# Altium PCB ESP Board.PcbDoc
Units mm, origin at the board's own origin, x right, y up, seen from the top; angles counter-clockwise.
Board outline 65 x 65 mm, 2 copper layers (Top Layer, Bottom Layer); 39 components, 26 nets, 140 pads, 0 vias.
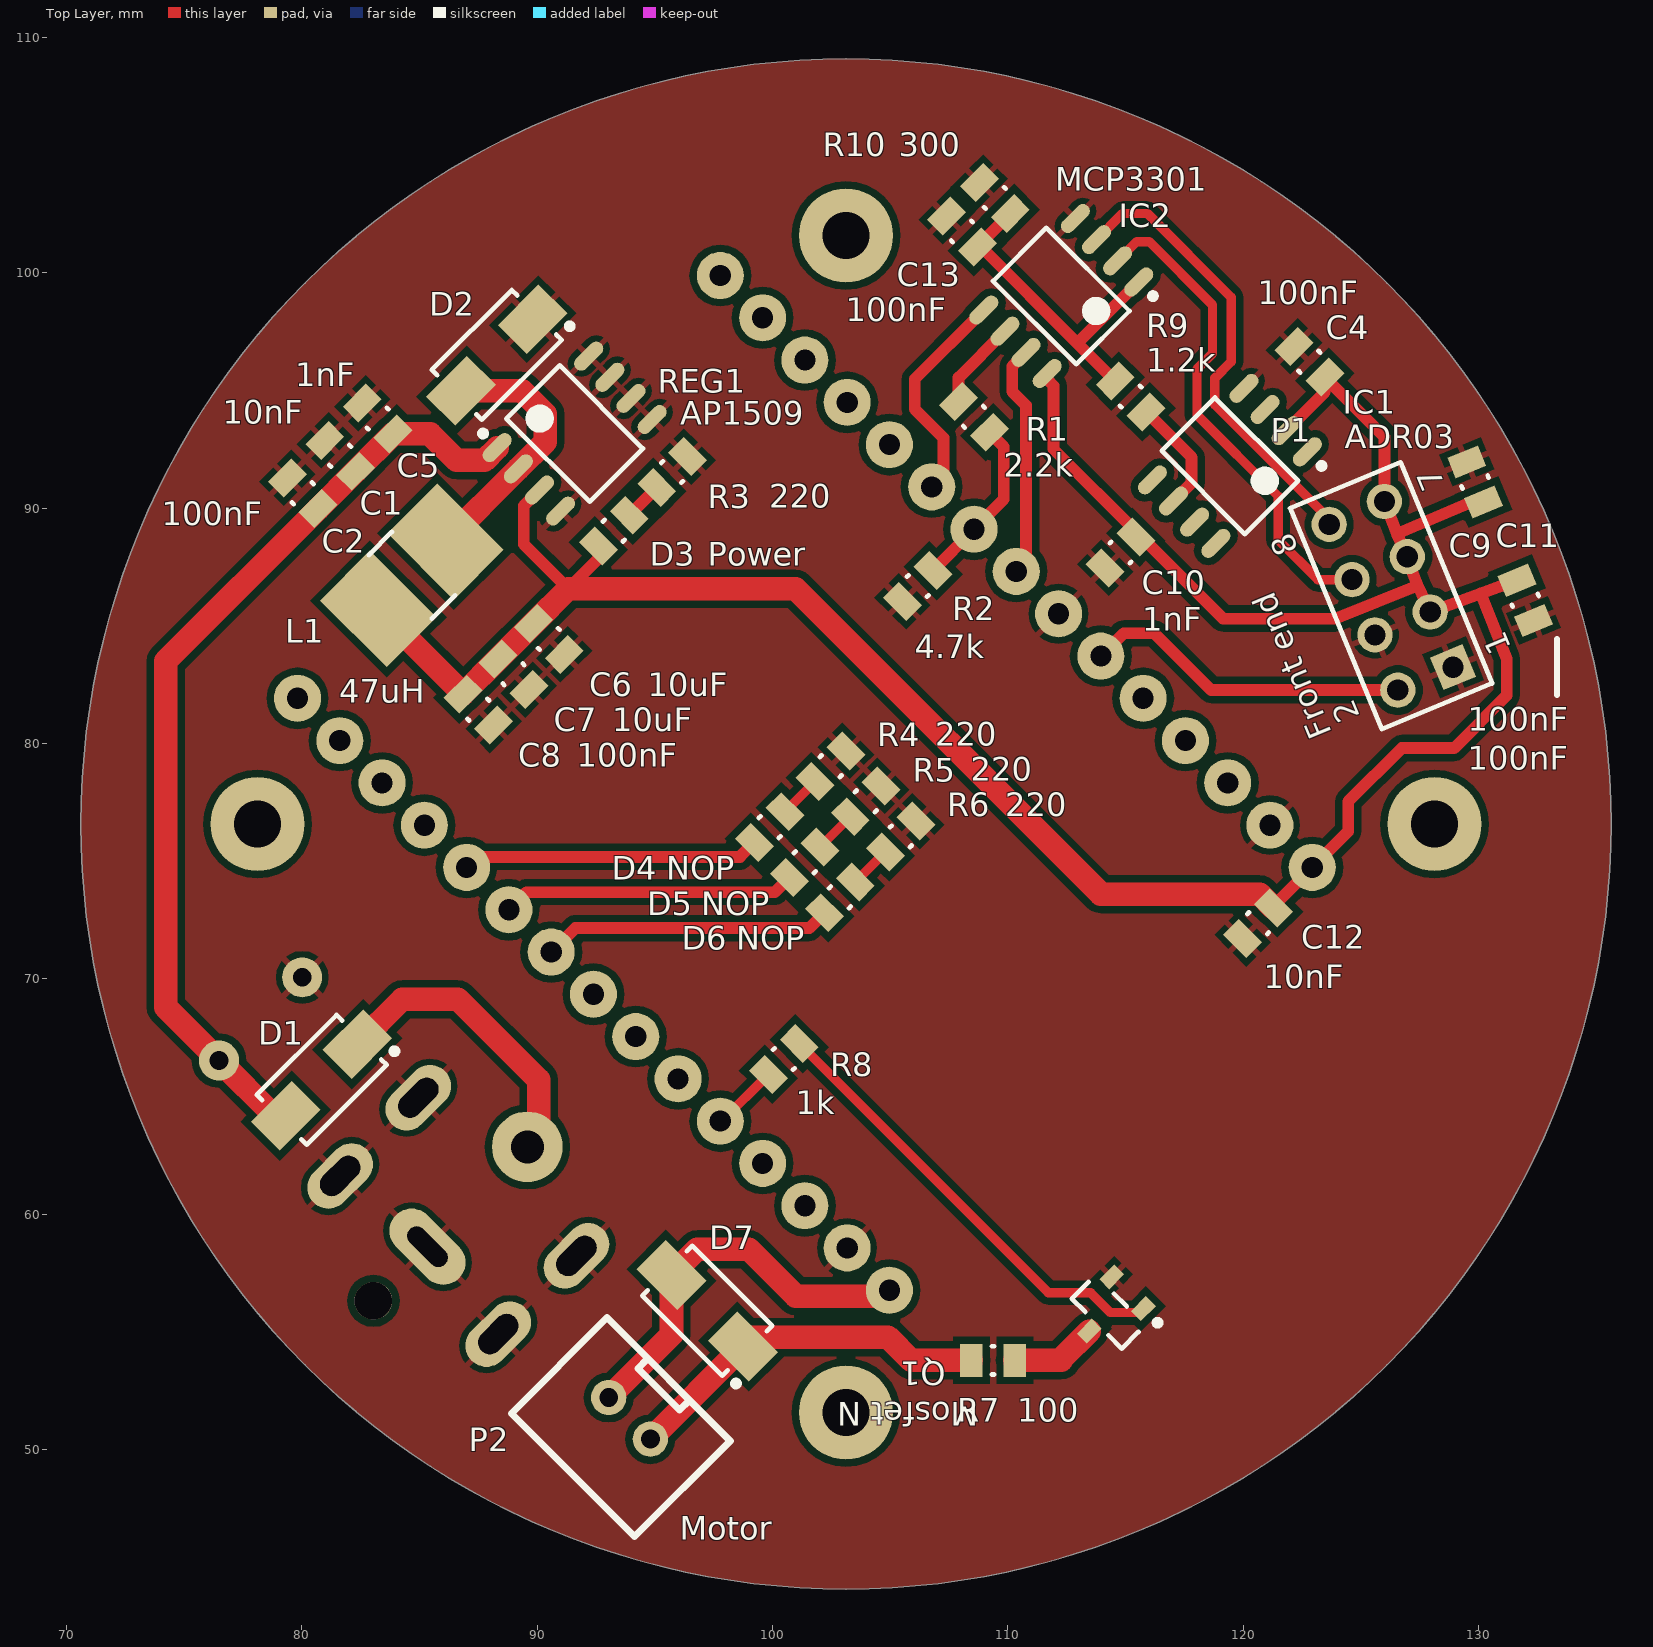
[diagram p0: Top Layer view]
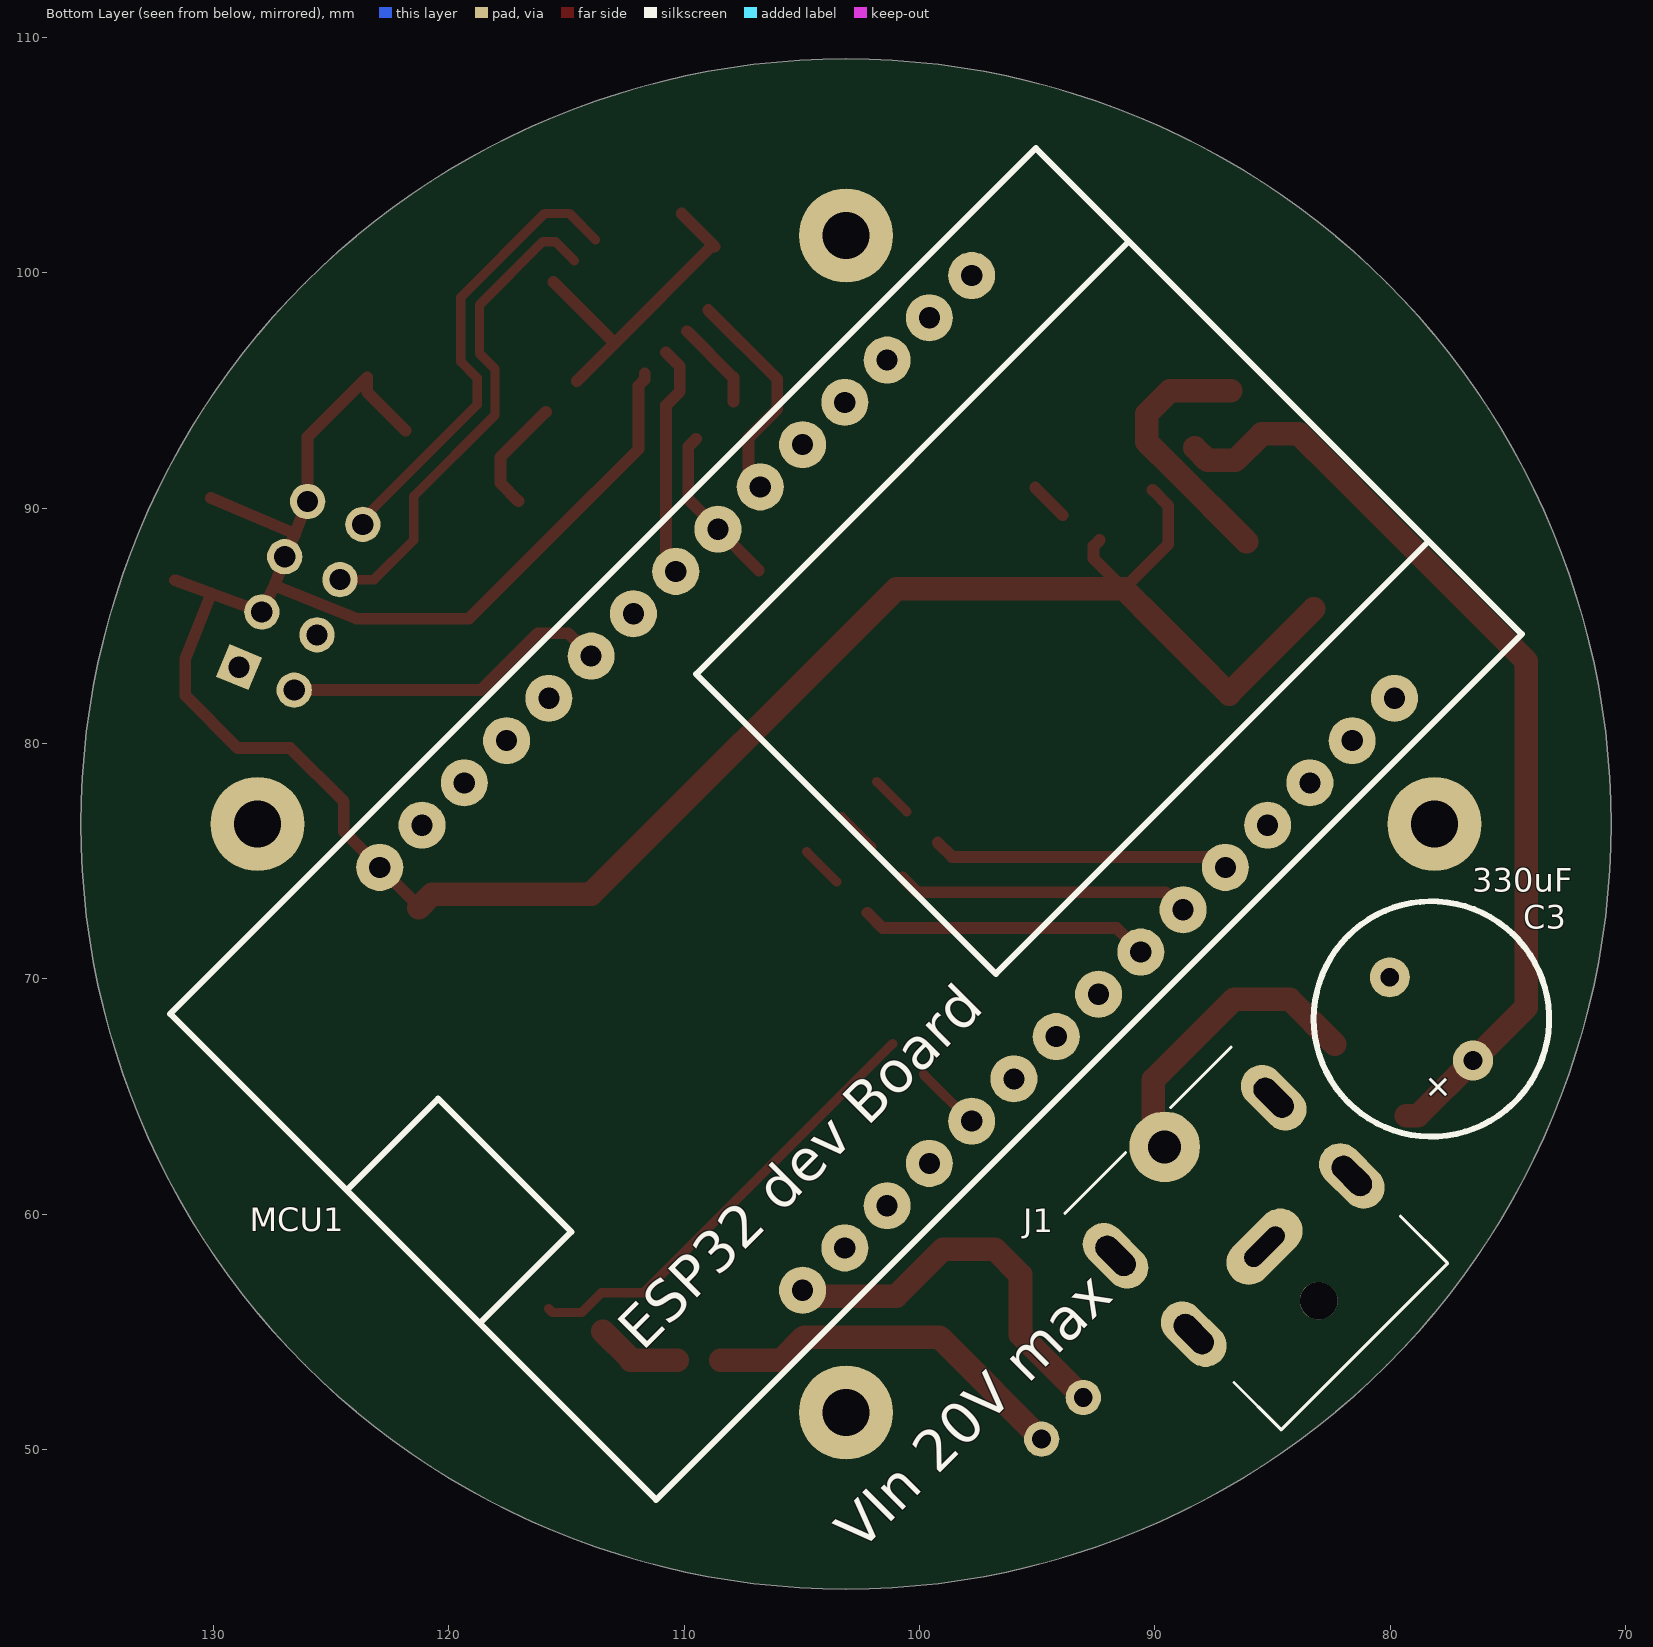
[diagram p1: Bottom Layer view, seen from below]

## Layer stack, top to bottom
Top Solder: solder mask 0.0102, Solder Resist, Dk 3.5
Top Layer: signal copper 0.0356
Dielectric 1: dielectric 0.32, FR-4, Dk 4.8
Bottom Layer: signal copper 0.0356
Bottom Solder: solder mask 0.0102, Solder Resist, Dk 3.5

## Board outline
70.624,76.581 ccw(c103.124,76.581) 103.124,44.081 ccw(c103.124,76.581) 135.624,76.581 ccw(c103.124,76.581) 103.124,109.081 ccw(c103.124,76.581)

## Design rules (kind name [scope] priority, off if disabled: settings)
Clearance [All] p1: gap=0.3 ignorepadtopadclearanceinfootprint=FALSE except(0: Arc-Text Arc-Hole Track-Text Track-Hole SMDPad-Text SMDPad-Hole THPad-Text THPad-Hole Via-Text Via-Hole Fill-Text Fill-Hole Poly-Text Poly-Hole Region-Text Region-Hole Text-Text Text-Hole; 0.2: Arc-Arc Arc-Track Arc-SMDPad Arc-THPad Arc-Via Track-Track Track-SMDPad Track-THPad Track-Via SMDPad-SMDPad SMDPad-THPad SMDPad-Via THPad-THPad THPad-Via Via-Via)
PolygonConnect [All] p1: connectstyle=Relief reliefconductorwidth=0.254 reliefentries=4 polygonreliefangle="90 Angle" airgapwidth=0.254
RoutingVias [All] p1: holewidth=0.711 width=1.27 viastyle="Through Hole" minholewidth=0.711 minwidth=1.27 maxholewidth=0.711 maxwidth=1.27
SolderMaskExpansion [All] p1: expansion=0.102
Width [All] p1: maxlimit=10 minlimit=0.15 preferedwidth=0.254 minimp=50.000000 maximp=50.000000 favimp=50.000000
30 further rules are at their usual default settings.

## Components (designator, comment, footprint, x,y, rotation, side; value= is the part's Value field where it differs from the comment)
C1 "10nF" 0805 81.638,92.218 r315 top
C2 "100nF" 0805 80.048,90.629 r315 top
C3 "330uF" ESL476M100AH9AA 78.257,68.301 r45 bottom
C4 "100nF" 0805 122.809,96.215 r315 top
C5 "1nF" 0805 83.227,93.808 r315 top
C6 "10uF" 0805 90.501,84.44 r315 top
C7 "10uF" 0805 89.002,82.94 r315 top
C8 "100nF" 0805 87.502,81.44 r315 top
C9 "100nF" 0805 129.845,91.11 r112.5 top
C10 "1nF" 0805 114.783,88.113 r45 top
C11 "100nF" 0805 131.978,86.081 r112.5 top
C12 "10nF" 0805 120.628,72.365 r45 top
C13 "100nF" 0805 108.052,101.752 r315 top
D1 "Diode" DO-214 80.848,65.71 r225 top
D2 "Diode" DO-214 88.294,96.505 r225 top
D3 "Power" 0805 93.261,89.043 r45 top
D4 "NOP" 0805 99.883,76.448 r45 top
D5 "NOP" 0805 101.374,74.957 r45 top
D6 "NOP" 0805 102.864,73.467 r45 top
D7 "Diode" DO-214 97.231,55.905 r135 top
IC1 "ADR03" SOIC8 119.431,91.796 r225 top
IC2 "MCP3301" SOIC8 112.268,99.009 r225 top
J1 "VIn 20V max" PJ-082BH 85.7,58.979 r45 bottom
L1 "47uH" "1812 Low density" 84.684,87.147 r45 top
MCU1 "ESP32 dev Board" "ESP32 dev board" 101.377,78.328 r225 bottom locked
P1 "Front end" HDR2X4 128.911,83.241 r112.5 top
P2 "Motor" XH2 93.929,51.333 r135 top
Q1 "Mosfet N" "sot 23" 114.275,55.855 r225 top
R1 "2.2k" 0805 108.56,93.876 r315 top
R2 "4.7k" 0805 106.172,86.69 r45 top
R3 "220" 0805 95.739,91.531 r225 top
R4 "220" 0805 102.469,79.035 r225 top
R5 "220" 0805 103.96,77.544 r45 top
R6 "220" 0805 105.451,76.053 r45 top
R7 "100" 0805 109.372,53.797 r0 top
R8 "1k" 0805 100.482,66.599 r225 top
R9 "1.2k" 0805 115.214,94.742 r315 top
R10 "300" 0805 109.449,103.175 r315 top
REG1 "AP1509" SOIC8 91.598,93.164 r45 top

## Footprints (in the part's own frame and the unit in brackets; to place one, negate y for a bottom-side part, rotate by r counter-clockwise, add the part's x,y. Pads: shape width x height; smd on the part's side, far side on the other; paste and mask are expansions set on the pad)
0805 [mm] "Chip Resistor, 2-Leads, Body 2.00x1.25mm, IPC Medium Density"
  rect 0.95x1.4 smd: 1(-0.925,0) 2(0.925,0)
  silkscreen extent -0.05,-0.6 0.05,0.6, body extent -1.05,-0.7 1.05,0.7, height 0.55
"1812 Low density" [mm] "Chip Inductor, 2-Leads, Body 4,50x3,20mm, IPC Low Density"
  rect 3x4 smd: 1(-2.02,0) 2(2.02,0)
  silkscreen extent -0.7,-1.9 0.7,1.9, body extent -2.4,-1.7 2.4,1.7, height 2.8
DO-214 [mm] "Molded Diode, 2-Leads, Body 4.38x2.73mm, IPC Medium Density"
  rect 2.45x1.75 smd: 1(-2.15,0) 2(2.15,0)
  silkscreen extent -3.17,-1.5 2.4,1.5, body extent -2.6,-1.48 2.6,1.48, height 2.2
ESL476M100AH9AA [mm]
  round 1.7 hole 0.8: 1(-2.5,0) 2(2.5,0)
  silkscreen extent -5,-5 5,5, body extent -5.25,-5.25 5.25,5.25, height 14.11
"ESP32 dev board" [mm]
  round 2 hole 0.9: 1(-12.7,17.78) 2(-12.7,15.24) 3(-12.7,12.7) 4(-12.7,10.16) 5(-12.7,7.62) 6(-12.7,5.08) 7(-12.7,2.54) 8(-12.7,0) 9(-12.7,-2.54) 10(-12.7,-5.08) 11(-12.7,-7.62) 12(-12.7,-10.16) 13(-12.7,-12.7) 14(-12.7,-15.24) 15(-12.7,-17.78) 16(12.7,-17.78) 17(12.7,-15.24) 18(12.7,-12.7) 19(12.7,-10.16) 20(12.7,-7.62) 21(12.7,-5.08) 22(12.7,-2.54) 23(12.7,0) 24(12.7,2.54) 25(12.7,5.08) 26(12.7,7.62) 27(12.7,10.16) 28(12.7,12.7) 29(12.7,15.24) 30(12.7,17.78)
  silkscreen extent -14.6,-28.47 14.6,23.53
HDR2X4 [mm] "Connector; Header; 4x2 Position"
  rect 1.5x1.5 hole 0.9: 1(0,0)
  round 1.5 hole 0.9: 2(0,2.54) 3(2.54,0) 4(2.54,2.54) 5(5.08,0) 6(5.08,2.54) 7(7.62,0) 8(7.62,2.54)
  silkscreen extent -1.27,-1.27 8.89,3.81
PJ-082BH [mm] "Barrel Power Jack"
  round 3 hole 1.4: 1(5.5,0)
  oval 1.9x3.8 hole 0.8 slot 2.1 at 90 deg: 2(-0.5,0)
  oval 3.2x1.8 hole 1 slot 2 at 0 deg: 3(-1,-4.75) 3(-1,4.75) 3(3.7,-4.75) 3(3.7,4.75)
  round 1.6 hole 1.6 unplated: ""(-3.75,0)
  silkscreen extent -6.5,-5 6.5,5, body extent -6.59,-5.09 6.54,5.11, height 10
SOIC8 [mm] "SOIC, 8-Leads, Body 4.90x3.90mm, Pitch 1.27mm, IPC Medium Density"
  oval 1.5x0.6 smd: 1(-2.75,1.905) 2(-2.75,0.635) 3(-2.75,-0.635) 4(-2.75,-1.905) 5(2.75,-1.905) 6(2.75,-0.635) 7(2.75,0.635) 8(2.75,1.905)
  silkscreen extent -2.87,-2.5 1.6,2.88, body extent -3,-2.5 3,2.5, height 1.75
"sot 23" [mm] "SOT23, 3-Leads, Body 2.90x2.30mm, Pitch 0.95mm, IPC Medium Density"
  rect 0.9x0.6 smd: 1(-1.15,0.95) 2(-1.15,-0.95) 3(1.15,0)
  silkscreen extent -1.27,-1.5 0.7,1.92, body extent -1.3,-1.5 1.3,1.5, height 1.1
XH2 [mm]
  round 1.5 hole 0.8: 1(-1.25,0) 2(1.25,0)
  silkscreen extent -3.7,-2.35 3.7,3.4, body extent -3.7,-2.35 3.7,3.4, height 7

## Part data
C1 C2 C4 C5 C6 C7 C8 C9 C10 C11 C12 C13: library part Cap, Supplier Part Number 1=1276-2044-1-ND, Supplier Part Number 10=1276-CL10B104KB8NNNLCT-ND, Supplier Part Number 11=399-1085-1-ND, Supplier Part Number 12=1276-1021-1-ND, Supplier Part Number 13=587-2985-1-ND, Supplier Part Number 14=490-14603-1-ND, Supplier Part Number 15=311-3700-1-ND, Supplier Part Number 16=311-1042-1-ND, Supplier Part Number 17=311-1415-1-ND, Supplier Part Number 18=1276-1907-1-ND, Supplier Part Number 19=587-4321-1-ND, Supplier 1=Digi-Key, Supplier 2=Digi-Key, Supplier 3=Digi-Key, Supplier 4=Digi-Key, Supplier 5=Digi-Key, Supplier 6=Digi-Key, Supplier 7=Digi-Key, Supplier 8=Digi-Key, Supplier 9=Digi-Key, Supplier 10=Digi-Key, Supplier 11=Digi-Key, Supplier 12=Digi-Key, Supplier 13=Digi-Key, Supplier 14=Digi-Key, Supplier 15=Digi-Key, Supplier 16=Digi-Key, Supplier 17=Digi-Key, Supplier 18=Digi-Key, Supplier 19=Digi-Key, Supplier 20=Digi-Key, Supplier 21=Digi-Key, Supplier 22=Digi-Key, Supplier Part Number 2=1276-1018-1-ND, Supplier Part Number 3=1276-1182-1-ND, Supplier Part Number 4=1276-1009-1-ND, Supplier Part Number 5=1276-1098-1-ND, Supplier Part Number 6=1276-1119-1-ND, Supplier Part Number 7=490-12737-1-ND, Supplier Part Number 8=1276-1183-1-ND, Supplier Part Number 9=587-1249-1-ND, Supplier Part Number 20=1276-6767-1-ND, Supplier Part Number 21=1276-7060-1-ND, Supplier Part Number 22=311-1084-1-ND
C3: library part "Cap Polar", Supplier Part Number 1=478-9181-1-ND, Supplier 1=Digi-Key, Supplier 2=Digi-Key, Supplier 3=Digi-Key, Supplier 4=Digi-Key, Supplier 5=Digi-Key, Supplier 6=Digi-Key, Supplier 7=Digi-Key, Supplier 8=Digi-Key, Supplier Part Number 2=478-9173-1-ND, Supplier Part Number 3=493-11037-ND, Supplier Part Number 4=PCE3462CT-ND, Supplier Part Number 5=399-18864-1-ND, Supplier Part Number 6=399-10512-1-ND, Supplier Part Number 7=399-15746-ND, Supplier Part Number 8=1189-3752-1-ND
D1 D2 D7: "Cmon its a diode what more do I need to say?", Supplier Part Number 1=MBR10100GOS-ND, Supplier 1=Digi-Key, Supplier 2=Digi-Key, Supplier Part Number 2=1655-1504-1-ND
D3 D4 D5 D6: library part LED, Supplier Part Number 1=732-4979-1-ND, Supplier 1=Digi-Key, Supplier 2=Digi-Key, Supplier 3=Digi-Key, Supplier 4=Digi-Key, Supplier Part Number 2=732-4971-1-ND, Supplier Part Number 3=732-4966-1-ND, Supplier Part Number 4=732-4981-1-ND
IC1: library part ADR0X, "Precision voltage reference 0.1%", Supplier Part Number 1=ADR02ARZ-ND, Supplier 1=Digi-Key
IC2: "13 bit differential ADC", Supplier Part Number 1=MCP3301-BI/SN-ND, Supplier 1=Digi-Key
J1: library part "Barrel Power Plug", Supplier Part Number 1=CP-082BHTR-ND, Supplier 1=Digi-Key
L1: library part Inductor, Supplier Part Number 1=541-1250-1-ND, Supplier Part Number 10=SRP1770TA-5R6MCT-ND, Supplier Part Number 11=SRN6028-100MCT-ND, Supplier Part Number 12=SRN2510F-2R2MCT-ND, Supplier Part Number 13=490-3992-1-ND, Supplier 1=Digi-Key, Supplier 2=Digi-Key, Supplier 3=Digi-Key, Supplier 4=Digi-Key, Supplier 5=Digi-Key, Supplier 6=Digi-Key, Supplier 7=Digi-Key, Supplier 8=Digi-Key, Supplier 9=Digi-Key, Supplier 10=Digi-Key, Supplier 11=Digi-Key, Supplier 12=Digi-Key, Supplier 13=Digi-Key, Supplier Part Number 2=541-1253-1-ND, Supplier Part Number 3=SRN6028-3R9MCT-ND, Supplier Part Number 4=SRN6028-4R7MCT-ND, Supplier Part Number 5=490-10563-1-ND, Supplier Part Number 6=1276-6932-1-ND, Supplier Part Number 7=587-2042-1-ND, Supplier Part Number 8=535-12790-1-ND, Supplier Part Number 9=SRP1265A-1R0MCT-ND
MCU1: "Dev board of the esp32"
P1: library part "Header 4X2", "Header, 4-Pin, Dual row", LatestRevisionDate=17-Jul-2002, LatestRevisionNote="Re-released for DXP Platform.", Publisher="Altium Limited"
P2: library part "Header 2", "Header, 2-Pin", LatestRevisionDate=17-Jul-2002, LatestRevisionNote="Re-released for DXP Platform.", Publisher="Altium Limited"
Q1: Supplier Part Number 1=1727-5305-1-ND, Supplier 1=Digi-Key, Supplier 2=Digi-Key, Supplier 3=Digi-Key, Supplier 4=Digi-Key, Supplier 5=Digi-Key, Supplier 6=Digi-Key, Supplier 7=Digi-Key, Supplier Part Number 2=1727-1123-1-ND, Supplier Part Number 3=BSC0906NSATMA1CT-ND, Supplier Part Number 4=T2N7002AKLMCT-ND, Supplier Part Number 5=1727-4714-1-ND, Supplier Part Number 6=497-14572-5-ND, Supplier Part Number 7=IPP180N10N3GXKSA1-ND
R1 R2 R3 R4 R5 R6 R7 R8 R9 R10: library part Resistor, Supplier Part Number 1=RHM10DCT-ND, Supplier Part Number 10=311-200JRCT-ND, Supplier Part Number 11=311-300JRCT-ND, Supplier Part Number 12=YAG3356CT-ND, Supplier Part Number 13=311-220GRCT-ND, Supplier Part Number 14=311-220KGRCT-ND, Supplier Part Number 15=311-1.0KGRCT-ND, Supplier Part Number 16=311-200KHRCT-ND, Supplier Part Number 17=A102451-ND, Supplier Part Number 18=311-2.00KHRCT-ND, Supplier Part Number 19=311-10KGRCT-ND, Supplier 1=Digi-Key, Supplier 2=Digi-Key, Supplier 3=Digi-Key, Supplier 4=Digi-Key, Supplier 5=Digi-Key, Supplier 6=Digi-Key, Supplier 7=Digi-Key, Supplier 8=Digi-Key, Supplier 9=Digi-Key, Supplier 10=Digi-Key, Supplier 11=Digi-Key, Supplier 12=Digi-Key, Supplier 13=Digi-Key, Supplier 14=Digi-Key, Supplier 15=Digi-Key, Supplier 16=Digi-Key, Supplier 17=Digi-Key, Supplier 18=Digi-Key, Supplier 19=Digi-Key, Supplier 20=Digi-Key, Supplier 21=Digi-Key, Supplier 22=Digi-Key, Supplier 23=Digi-Key, Supplier 24=Digi-Key, Supplier 25=Digi-Key, Supplier 26=Digi-Key, Supplier 27=Digi-Key, Supplier 28=Digi-Key, Supplier 29=Digi-Key, Supplier 30=Digi-Key, Supplier 31=Digi-Key, Supplier 32=Digi-Key, Supplier 33=Digi-Key, Supplier 34=Digi-Key, Supplier 35=Digi-Key, Supplier 36=Digi-Key, Supplier 37=Digi-Key, Supplier 38=Digi-Key, Supplier 39=Digi-Key, Supplier 40=Digi-Key, Supplier 41=Digi-Key, Supplier 42=Arrow, Supplier Part Number 2=696-1834-1-ND, Supplier Part Number 3=RMCF0603JT3K90CT-ND, Supplier Part Number 4=RHM1.0KDCT-ND, Supplier Part Number 5=RHM100DCT-ND, Supplier Part Number 6=RMCF0603FT54K9CT-ND, Supplier Part Number 7=RMCF0603FT40K2CT-ND, Supplier Part Number 8=P200LCT-ND, Supplier Part Number 9=311-1.0KJRCT-ND, Supplier Part Number 20=311-1.00LRCT-ND, Supplier Part Number 21=311-220JRCT-ND, Supplier Part Number 22=311-2.2KJRCT-ND, Supplier Part Number 23=311-4.7KJRCT-ND, Supplier Part Number 24=311-10.0KLRCT-ND, Supplier Part Number 25=311-12KJRCT-ND, Supplier Part Number 26=YAG3226CT-ND, Supplier Part Number 27=311-75KJRCT-ND, Supplier Part Number 28=311-200KJRCT-ND, Supplier Part Number 29=311-499KLRCT-ND, Supplier Part Number 30=YAG6087CT-ND, Supplier Part Number 31=696-1677-1-ND, Supplier Part Number 32=541-3127-6-ND, Supplier Part Number 33=311-47.0HRCT-ND, Supplier Part Number 34=311-470HRCT-ND, Supplier Part Number 35=311-470KGRCT-ND, Supplier Part Number 36=311-100KGRCT-ND, Supplier Part Number 37=311-5.23KHRCT-ND, Supplier Part Number 38=311-52.3KHRCT-ND, Supplier Part Number 39=311-22KGRCT-ND, Supplier Part Number 40=311-15.8KHRCT-ND, Supplier Part Number 41=311-7.15KHRCT-ND, Supplier Part Number 42=RC0603FR-072K2L
REG1: "Fixed voltage buck regulator", Supplier Part Number 1=AP1509-50SGDICT-ND, Supplier 1=Digi-Key

## Free pads (board coordinates)
  round 4 hole 2: ""(78.124,76.581) ""(103.124,51.581) ""(103.124,101.581) ""(128.124,76.581)

## Nets (pads, with @x,y where several pads share a name; then routed paths per layer and width w, separated by ;. In a path a pad name is that pad's centre, name@x,y a point inside that pad or via, vN(x,y) a via of type N, cw(c..) or ccw(c..) an arc to the next point about the centre after c; other vN are vias at no path point)
3.3V: D7.2 MCU1.16 P2.2 | length 17
  Top Layer w1: P2.2 95.711,54.883 D7.2 96.807,58.522 98.995,58.522 100.996,56.52 104.715,56.52 MCU1.16
5V: C4.2 C6.1 C7.1 C8.1 C9.1 C10.2 C11.2 C12.2 D3.1 IC1.2 IC2.8 L1.1 MCU1.15 P1.3 P1.5 P1.7 REG1.3 | length 118.6
  Top Layer w0.5: REG1.3 89.433,90.101 89.433,88.468 91.327,86.574 92.607,87.853 D3.1 D3.1@92.354,88.642 ; IC2.8 111.67,95.467 111.938,95.199 111.938,92.506 115.557,88.887 119.141,85.303 123.933,85.303 127.406,86.716 ; C12.2 121.282,73.088 MCU1.15 124.46,76.265 124.46,77.538 126.729,79.807 128.956,79.807 131.191,82.042 131.191,83.617 130.087,86.373 ; IC1.2 123.463,94.93 C4.2 125.995,93.029 P1.7 126.537,88.911 ; P1.3@128.093,85.434 P1.3 ; C9.1@130.097,90.433 126.537,88.911 ; C11.2 130.087,86.373 ; 126.537,88.911 126.526,88.907 126.612,88.722 ; 126.537,88.911 126.612,88.722 ; 126.612,88.722 126.93,87.92 127.406,86.716 ; 127.406,86.716 P1.3 ; P1.3 130.087,86.373
  Top Layer w1: L1.1 86.848,82.126 C8.1 C7.1 C6.1 91.327,86.574 100.979,86.574 113.952,73.602 120.699,73.602 C12.2
GND: C1.1 C2.1 C3.2 C4.1 C5.1 C6.2 C7.2 C8.2 C9.2 C10.1 C11.1 C12.1 C13.1 D2.1 IC1.4 IC2.4 J1.2 J1.3 MCU1.9 MCU1.14 MCU1.17 P1.1 P1.4 Q1.2 R2.1 R3.1 R4.1 R5.2 R6.2 R10.1 REG1.4 REG1.5 REG1.6 REG1.7 REG1.8
NetD1_1: D1.1 J1.1 | length 13
  Top Layer w1: D1.1 84.277,69.139 86.639,69.139 90.068,65.71 90.068,63.348 J1.1
NetD2_2: D2.2 L1.2 REG1.2 | length 11.2
  Top Layer w1: L1.2 REG1.2 90.348,92.812 90.348,93.997 89.36,94.985 D2.2
NetD3_2: D3.2 R3.2 | length 1.7
  Top Layer w0.5: D3.2 95.085,90.868 R3.2
NetD4_1: D4.1 MCU1.26 | length 12.7
  Top Layer w0.5: MCU1.26 87.458,75.184 98.619,75.184 D4.1
NetD4_2: D4.2 R4.2 | length 1.8
  Top Layer w0.4: D4.2 R4.2
NetD5_1: D5.1 MCU1.25 | length 12.5
  Top Layer w0.5: MCU1.25 89.551,73.685 100.102,73.685 D5.1
NetD5_2: D5.2 R5.1 | length 1.8
  Top Layer w0.4: D5.2 R5.1
NetD6_1: D6.1 MCU1.24 | length 12.3
  Top Layer w0.5: MCU1.24 91.619,72.161 101.559,72.161 D6.1
NetD6_2: D6.2 R6.1 | length 1.8
  Top Layer w0.4: D6.2 R6.1
NetD7_1: D7.1 P2.1 R7.1 | length 15.8
  Top Layer w1: P2.1 94.816,50.45 D7.1 99.154,54.788 104.902,54.788 105.893,53.797 R7.1
NetIC1_6: IC1.6 R9.2 | length 4.9
  Top Layer w0.5: R9.2 117.805,92.151 117.805,91.068 IC1.6
NetIC2_2: IC2.2 P1.6 | length 21
  Top Layer w0.4: IC2.2 115.477,101.321 116.002,101.321 118.694,98.628 118.694,96.571 118.034,95.91 118.034,93.955 121.488,90.5 121.488,88.646 123.172,86.962 P1.6
NetIC2_3: IC2.3 P1.8 | length 19.8
  Top Layer w0.4: IC2.3 114.875,102.514 115.926,102.514 119.482,98.958 119.482,96.215 118.794,95.528 118.794,94.388 123.648,89.534 P1.8
  Bottom Layer w0.4: P1.8@123.425,89.309 P1.8
NetIC2_5: IC2.5 MCU1.6 | length 9.4
  Top Layer w0.5: MCU1.6 107.264,91.399 107.264,92.989 106.048,94.205 106.048,95.484 IC2.5
NetIC2_6: IC2.6 R1.1 | length 3.8
  Top Layer w0.5: R1.1 107.906,95.545 IC2.6
NetIC2_7: IC2.7 MCU1.8 | length 10
  Top Layer w0.5: MCU1.8 110.769,87.72 110.769,94.365 110.185,94.949 110.185,96.028 IC2.7
NetMCU1_7: MCU1.7 R1.2 R2.2 | length 7
  Top Layer w0.5: R2.2 106.826,87.368 MCU1.7 109.83,90.372 109.83,92.606 R1.2@109.493,92.943
NetMCU1_10: MCU1.10 P1.2 | length 14
  Top Layer w0.5: MCU1.10 114.918,84.684 116.222,84.684 118.636,82.269 P1.2
NetMCU1_20: MCU1.20 R8.2 | length 2.9
  Top Layer w0.4: MCU1.20 97.843,63.959 R8.2
NetQ1_D: Q1.3 R7.2 | length 3.7
  Top Layer w1: R7.2 112.269,53.797 112.269,53.849 Q1.3
NetQ1_G: Q1.1 R8.1 | length 19.4
  Top Layer w0.4: R8.1 111.722,56.667 113.513,56.667 114.351,55.829 115.593,55.829 Q1.1
VBat: C1.2 C2.2 C3.1 C5.2 D1.2 REG1.1 | length 40.5
  Top Layer w1: D1.2 78.833,64.19 C3.1 74.219,68.804 74.219,83.491 C2.2 C1.2 C5.2 85.459,93.154 86.589,92.024 87.764,92.024 REG1.1
VRef: C13.2 IC2.1 R9.1 R10.2 | length 13.9
  Top Layer w0.5: R10.2 110.103,102.495 C13.2 108.858,101.098 112.955,97.002 ; R9.1 112.955,97.002 ; IC2.1 112.955,97.002
pads on no net: IC1.1 IC1.3 IC1.5 IC1.7 IC1.8 J1. MCU1.1 MCU1.2 MCU1.3 MCU1.4 MCU1.5 MCU1.11 MCU1.12 MCU1.13 MCU1.18 MCU1.19 MCU1.21 MCU1.22 MCU1.23 MCU1.27 MCU1.28 MCU1.29 MCU1.30

## Polygon pours and split planes (outlines as drawn)
GND on Top Layer "Top Layer-GND" (solid, pour order 2): 70.624,76.581 ccw(c103.124,76.581) 103.124,44.081 ccw(c103.124,76.581) 135.624,76.581 ccw(c103.124,76.581) 103.124,109.081 ccw(c103.124,76.581)

## Other copper
Top Layer:
  pour cut-out: 122.123,64.821
  pour cut-out: 120.625,68.148

## Silkscreen, mask and mechanical layers (free items; w line width, h text height)
Top Overlay:
  lines w0.254: 133.325,82.067 133.325,84.45
Mechanical 8:
  circle w0.254: c103.124,76.581 r32.5

## Text inside footprints (layer, text, board x,y; h text height)
C3: Bottom Overlay "+" at 76.874,65.553 h2 r225
P1: Top Overlay "8" at 122.356,88.236 h1 r112.5; Top Overlay "7" at 128.575,90.983 h1 r112.5; Top Overlay "1" at 131.405,84.055 h1 r112.5; Top Overlay "2" at 124.968,81.153 h1 r112.5